# Altium PCB FPv1.3.1.PcbDoc (part 2 of 4)
Units mm, origin at the board's own origin, x right, y up, seen from the top; angles counter-clockwise.
Board outline 81.28 x 53.34 mm, 4 copper layers (Top Layer, GROUND PLANE, POWER PLANE, Bottom Layer); 98 components, 183 nets, 614 pads, 312 vias.
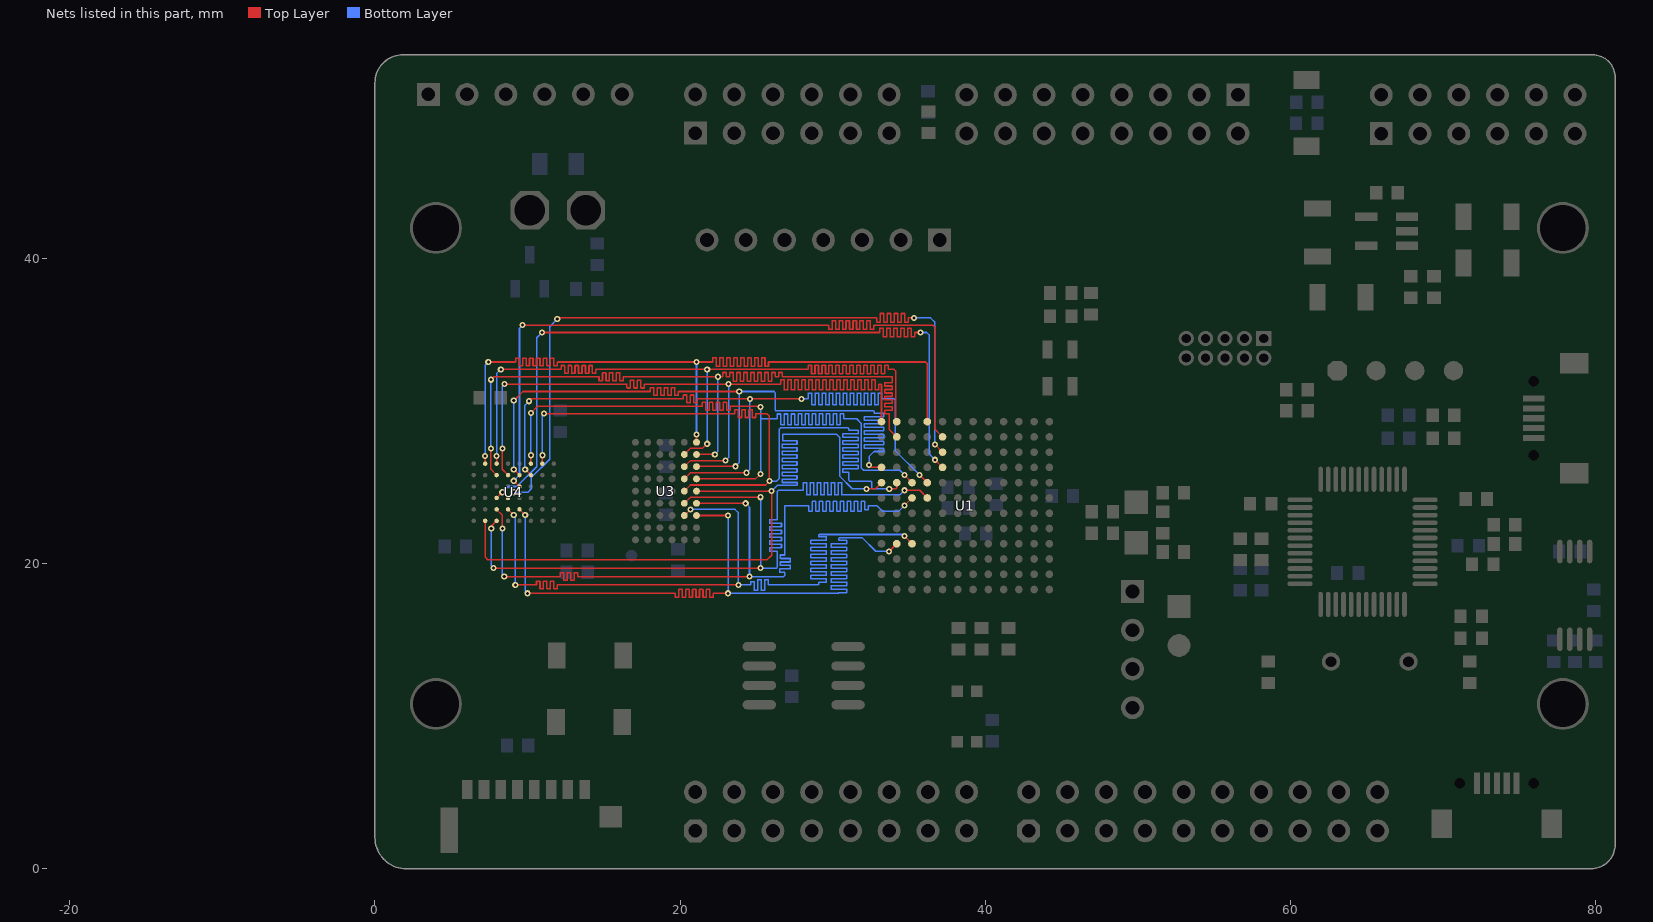
[diagram p4: the nets of this part, all layers, seen from the top]

## Via types
v1: diameter 0.403, hole 0.2, Top Layer to Bottom Layer, tented both sides, 261 vias
v2: diameter 0.503, hole 0.3, Top Layer to Bottom Layer, tented both sides, 25 vias
v3: diameter 0.6, hole 0.4, Top Layer to Bottom Layer, tented both sides, 11 vias
v4: diameter 0.508, hole 0.33, Top Layer to Bottom Layer, tented both sides, 5 vias
v5: diameter 0.703, hole 0.4, Top Layer to Bottom Layer, tented both sides, 3 vias
v6: diameter 0.603, hole 0.4, Top Layer to Bottom Layer, tented both sides, 2 vias
v7: diameter 0.503, hole 0.25, Top Layer to Bottom Layer, tented both sides, 2 vias
v8: diameter 0.6, hole 0.24, Top Layer to Bottom Layer, tented both sides, 1 vias
v9: diameter 0.508, hole 0.349, Top Layer to Bottom Layer, tented both sides, 1 vias
v10: diameter 0.603, hole 0.3, Top Layer to Bottom Layer, tented both sides, 1 vias

## Nets (pads, with @x,y where several pads share a name; then routed paths per layer and width w, separated by ;. In a path a pad name is that pad's centre, name@x,y a point inside that pad or via, vN(x,y) a via of type N, cw(c..) or ccw(c..) an arc to the next point about the centre after c; other vN are vias at no path point) (continued)
AD3: U1.B4 U3.G6 U4.D5 | length 61.7
  Top Layer w0.102: U4.D5@9.475,23.55 v1(9.85,23.175) ; v1(10,18.05) 19.65,18.05 cw(c19.65,18.029) 19.671,18.029 19.671,17.819 ccw(c19.694,17.819) 19.694,17.796 19.877,17.796 ccw(c19.877,17.819) 19.9,17.819 19.9,18.281 cw(c19.923,18.281) 19.923,18.304 20.105,18.304 cw(c20.105,18.281) 20.128,18.281 20.128,17.819 ccw(c20.151,17.819) 20.151,17.796 20.334,17.796 ccw(c20.334,17.819) 20.357,17.819 20.357,18.281 cw(c20.38,18.281) 20.38,18.304 20.563,18.304 cw(c20.563,18.281) 20.586,18.281 20.586,17.819 ccw(c20.608,17.819) 20.608,17.796 20.791,17.796 ccw(c20.791,17.819) 20.814,17.819 20.814,18.281 cw(c20.837,18.281) 20.837,18.304 21.02,18.304 cw(c21.02,18.281) 21.043,18.281 21.043,17.819 ccw(c21.066,17.819) 21.066,17.796 21.248,17.796 ccw(c21.248,17.819) 21.271,17.819 21.271,18.281 cw(c21.294,18.281) 21.294,18.304 21.477,18.304 cw(c21.477,18.281) 21.5,18.281 21.5,17.819 ccw(c21.523,17.819) 21.523,17.796 21.706,17.796 ccw(c21.706,17.819) 21.729,17.819 21.729,18.281 cw(c21.751,18.281) 21.751,18.304 21.934,18.304 cw(c21.934,18.281) 21.957,18.281 21.957,17.819 ccw(c21.98,17.819) 21.98,17.796 22.163,17.796 ccw(c22.163,17.819) 22.186,17.819 22.186,18.027 cw(c22.209,18.027) 22.209,18.05 v1(23.15,18.05) ; U3.G6@21.075,23.15 v1(23.15,23.15) ; v1(33.7,20.8) U1.B4@34.2,21.3
  Bottom Layer w0.102: v1(9.85,23.175) 9.85,18.2 v1(10,18.05) ; v1(23.15,23.15) v1(23.15,18.05) 30.369,18.05 30.404,18.085 30.404,18.098 30.9,18.098 ccw(c30.9,18.109) 30.912,18.109 30.912,18.315 ccw(c30.9,18.315) 30.9,18.326 29.907,18.326 cw(c29.907,18.338) 29.896,18.338 29.896,18.543 cw(c29.907,18.543) 29.907,18.555 30.9,18.555 ccw(c30.9,18.566) 30.912,18.566 30.912,18.772 ccw(c30.9,18.772) 30.9,18.783 29.907,18.783 cw(c29.907,18.795) 29.896,18.795 29.896,19 cw(c29.907,19) 29.907,19.012 30.9,19.012 ccw(c30.9,19.023) 30.912,19.023 30.912,19.229 ccw(c30.9,19.229) 30.9,19.241 29.907,19.241 cw(c29.907,19.252) 29.896,19.252 29.896,19.458 cw(c29.907,19.458) 29.907,19.469 30.9,19.469 ccw(c30.9,19.481) 30.912,19.481 30.912,19.686 ccw(c30.9,19.686) 30.9,19.698 29.907,19.698 cw(c29.907,19.709) 29.896,19.709 29.896,19.915 cw(c29.907,19.915) 29.907,19.926 30.9,19.926 ccw(c30.9,19.938) 30.912,19.938 30.912,20.143 ccw(c30.9,20.143) 30.9,20.155 29.907,20.155 cw(c29.907,20.166) 29.896,20.166 29.896,20.372 cw(c29.907,20.372) 29.907,20.383 30.9,20.383 ccw(c30.9,20.395) 30.912,20.395 30.912,20.601 ccw(c30.9,20.601) 30.9,20.612 29.907,20.612 cw(c29.907,20.624) 29.896,20.624 29.896,20.829 cw(c29.907,20.829) 29.907,20.841 30.9,20.841 ccw(c30.9,20.852) 30.912,20.852 30.912,21.058 ccw(c30.9,21.058) 30.9,21.069 29.907,21.069 cw(c29.907,21.081) 29.896,21.081 29.896,21.286 cw(c29.907,21.286) 29.907,21.298 30.9,21.298 ccw(c30.9,21.309) 30.912,21.309 30.912,21.515 ccw(c30.9,21.515) 30.9,21.526 30.404,21.526 30.404,21.641 30.463,21.7 31.919,21.7 32.819,20.8 v1(33.7,20.8)
AD4: U1.C4 U3.G5 U4.E5 | length 62.3
  Top Layer w0.102: U4.E5@8.725,23.55 v1(9.1,23.175) ; v1(9.2,18.6) 10.566,18.6 ccw(c10.566,18.623) 10.589,18.623 10.589,18.831 cw(c10.612,18.831) 10.612,18.854 10.795,18.854 cw(c10.795,18.831) 10.818,18.831 10.818,18.369 ccw(c10.841,18.369) 10.841,18.346 11.024,18.346 ccw(c11.024,18.369) 11.047,18.369 11.047,18.831 cw(c11.069,18.831) 11.069,18.854 11.252,18.854 cw(c11.252,18.831) 11.275,18.831 11.275,18.369 ccw(c11.298,18.369) 11.298,18.346 11.481,18.346 ccw(c11.481,18.369) 11.504,18.369 11.504,18.831 cw(c11.527,18.831) 11.527,18.854 11.709,18.854 cw(c11.709,18.831) 11.732,18.831 11.732,18.369 ccw(c11.755,18.369) 11.755,18.346 11.938,18.346 ccw(c11.938,18.369) 11.961,18.369 11.961,18.6 v1(23.825,18.6) ; U3.G5@20.275,23.15 v1(20.675,23.55) ; v1(34.7,21.8) U1.C4@35.2,21.3
  Bottom Layer w0.102: v1(9.1,23.175) 9.2,23.075 v1(9.2,18.6) ; v1(20.675,23.55) 23.6,23.55 23.825,23.325 v1(23.825,18.6) 24.625,18.6 24.625,18.795 cw(c24.637,18.795) 24.637,18.806 24.842,18.806 cw(c24.842,18.795) 24.854,18.795 24.854,18.265 ccw(c24.865,18.265) 24.865,18.253 25.071,18.253 ccw(c25.071,18.265) 25.082,18.265 25.082,18.935 cw(c25.094,18.935) 25.094,18.947 25.3,18.947 cw(c25.3,18.935) 25.311,18.935 25.311,18.265 ccw(c25.323,18.265) 25.323,18.253 25.528,18.253 ccw(c25.528,18.265) 25.54,18.265 25.54,18.935 cw(c25.551,18.935) 25.551,18.947 25.757,18.947 cw(c25.757,18.935) 25.768,18.935 25.768,18.6 29.039,18.6 29.083,18.644 29.083,18.783 29.58,18.783 ccw(c29.58,18.795) 29.591,18.795 29.591,19 ccw(c29.58,19) 29.58,19.012 28.586,19.012 cw(c28.586,19.023) 28.575,19.023 28.575,19.229 cw(c28.586,19.229) 28.586,19.241 29.58,19.241 ccw(c29.58,19.252) 29.591,19.252 29.591,19.458 ccw(c29.58,19.458) 29.58,19.469 28.586,19.469 cw(c28.586,19.481) 28.575,19.481 28.575,19.686 cw(c28.586,19.686) 28.586,19.698 29.58,19.698 ccw(c29.58,19.709) 29.591,19.709 29.591,19.915 ccw(c29.58,19.915) 29.58,19.926 28.586,19.926 cw(c28.586,19.938) 28.575,19.938 28.575,20.143 cw(c28.586,20.143) 28.586,20.155 29.58,20.155 ccw(c29.58,20.166) 29.591,20.166 29.591,20.372 ccw(c29.58,20.372) 29.58,20.383 28.586,20.383 cw(c28.586,20.395) 28.575,20.395 28.575,20.601 cw(c28.586,20.601) 28.586,20.612 29.58,20.612 ccw(c29.58,20.624) 29.591,20.624 29.591,20.829 ccw(c29.58,20.829) 29.58,20.841 28.586,20.841 cw(c28.586,20.852) 28.575,20.852 28.575,21.058 cw(c28.586,21.058) 28.586,21.069 29.58,21.069 ccw(c29.58,21.081) 29.591,21.081 29.591,21.286 ccw(c29.58,21.286) 29.58,21.298 28.586,21.298 cw(c28.586,21.309) 28.575,21.309 28.575,21.515 cw(c28.586,21.515) 28.586,21.526 29.58,21.526 ccw(c29.58,21.538) 29.591,21.538 29.591,21.744 ccw(c29.58,21.744) 29.58,21.755 29.083,21.755 29.083,21.869 29.117,21.903 34.597,21.903 v1(34.7,21.8)
AD5: U1.C7 U3.F6 U4.F5 | length 61.6
  Top Layer w0.102: U4.F5@7.975,23.55 8.35,23.175 v1(8.35,22.3) ; v1(8.475,19.15) 12.116,19.15 ccw(c12.116,19.173) 12.139,19.173 12.139,19.381 cw(c12.162,19.381) 12.162,19.404 12.345,19.404 cw(c12.345,19.381) 12.368,19.381 12.368,18.919 ccw(c12.391,18.919) 12.391,18.896 12.574,18.896 ccw(c12.574,18.919) 12.597,18.919 12.597,19.381 cw(c12.619,19.381) 12.619,19.404 12.802,19.404 cw(c12.802,19.381) 12.825,19.381 12.825,18.919 ccw(c12.848,18.919) 12.848,18.896 13.031,18.896 ccw(c13.031,18.919) 13.054,18.919 13.054,19.381 cw(c13.077,19.381) 13.077,19.404 13.259,19.404 cw(c13.259,19.381) 13.282,19.381 13.282,19.173 ccw(c13.305,19.173) 13.305,19.15 v1(24.55,19.15) ; U3.F6@21.075,23.95 v1(24.3,23.95) ; v1(34.7,23.8) U1.C7@35.2,24.3
  Bottom Layer w0.102: v1(8.35,22.3) 8.35,19.275 v1(8.475,19.15) ; v1(24.3,23.95) 24.55,23.7 v1(24.55,19.15) 26.795,19.15 26.848,19.202 26.848,19.418 26.538,19.418 cw(c26.538,19.43) 26.527,19.43 26.527,19.635 cw(c26.538,19.635) 26.538,19.647 27.217,19.647 ccw(c27.217,19.658) 27.229,19.658 27.229,19.864 ccw(c27.217,19.864) 27.217,19.875 26.59,19.875 cw(c26.59,19.887) 26.578,19.887 26.578,20.093 cw(c26.59,20.093) 26.59,20.104 27.217,20.104 ccw(c27.217,20.116) 27.229,20.116 27.229,20.321 ccw(c27.217,20.321) 27.217,20.333 26.59,20.333 cw(c26.59,20.344) 26.578,20.344 26.578,20.55 cw(c26.59,20.55) 26.59,20.561 26.848,20.561 26.848,23.749 26.899,23.8 28.435,23.8 28.435,23.419 28.664,23.419 28.664,24.097 28.892,24.097 28.892,23.419 29.121,23.419 29.121,24.097 29.35,24.097 29.35,23.419 29.578,23.419 29.578,24.097 29.807,24.097 29.807,23.419 30.035,23.419 30.035,24.097 30.264,24.097 30.264,23.419 30.493,23.419 30.493,24.097 30.721,24.097 30.721,23.419 30.95,23.419 30.95,24.097 31.178,24.097 31.178,23.419 31.407,23.419 31.407,24.097 31.636,24.097 31.636,23.419 31.864,23.419 31.864,24.097 32.093,24.097 32.093,23.519 32.322,23.519 32.322,23.8 32.893,23.8 33.274,23.419 34.319,23.419 v1(34.7,23.8)
AD6: U1.D7 U3.F5 U4.F6 | length 63.2
  Top Layer w0.102: v1(7.625,22.3) 7.625,22.45 U4.F6@7.975,22.8 ; v1(7.775,19.7) v1(25.275,19.7) ; U3.F5@20.275,23.95 20.675,24.35 v1(25.275,24.35) ; v1(34.7,24.8) 35.7,24.8 U1.D7@36.2,24.3
  Bottom Layer w0.102: v1(7.625,22.3) 7.625,19.85 v1(7.775,19.7) ; v1(25.275,24.35) v1(25.275,19.7) 26.3,19.7 26.375,19.775 26.375,20.815 25.878,20.815 cw(c25.878,20.827) 25.867,20.827 25.867,21.032 cw(c25.878,21.032) 25.878,21.044 26.633,21.044 ccw(c26.633,21.055) 26.645,21.055 26.645,21.261 ccw(c26.633,21.261) 26.633,21.273 25.878,21.273 cw(c25.878,21.284) 25.867,21.284 25.867,21.49 cw(c25.878,21.49) 25.878,21.501 26.633,21.501 ccw(c26.633,21.513) 26.645,21.513 26.645,21.718 ccw(c26.633,21.718) 26.633,21.73 25.878,21.73 cw(c25.878,21.741) 25.867,21.741 25.867,21.947 cw(c25.878,21.947) 25.878,21.958 26.633,21.958 ccw(c26.633,21.97) 26.645,21.97 26.645,22.175 ccw(c26.633,22.175) 26.633,22.187 25.878,22.187 cw(c25.878,22.198) 25.867,22.198 25.867,22.404 cw(c25.878,22.404) 25.878,22.415 26.633,22.415 ccw(c26.633,22.427) 26.645,22.427 26.645,22.633 ccw(c26.633,22.633) 26.633,22.644 25.878,22.644 cw(c25.878,22.656) 25.867,22.656 25.867,22.861 cw(c25.878,22.861) 25.878,22.873 26.375,22.873 26.375,24.724 26.441,24.79 28.08,24.79 28.08,25.287 cw(c28.091,25.287) 28.091,25.298 28.297,25.298 cw(c28.297,25.287) 28.308,25.287 28.308,24.515 ccw(c28.32,24.515) 28.32,24.503 28.525,24.503 ccw(c28.525,24.515) 28.537,24.515 28.537,25.287 cw(c28.548,25.287) 28.548,25.298 28.754,25.298 cw(c28.754,25.287) 28.765,25.287 28.765,24.515 ccw(c28.777,24.515) 28.777,24.503 28.983,24.503 ccw(c28.983,24.515) 28.994,24.515 28.994,25.287 cw(c29.006,25.287) 29.006,25.298 29.211,25.298 cw(c29.211,25.287) 29.223,25.287 29.223,24.515 ccw(c29.234,24.515) 29.234,24.503 29.44,24.503 ccw(c29.44,24.515) 29.451,24.515 29.451,25.287 cw(c29.463,25.287) 29.463,25.298 29.668,25.298 cw(c29.668,25.287) 29.68,25.287 29.68,24.515 ccw(c29.691,24.515) 29.691,24.503 29.897,24.503 ccw(c29.897,24.515) 29.909,24.515 29.909,25.287 cw(c29.92,25.287) 29.92,25.298 30.126,25.298 cw(c30.126,25.287) 30.137,25.287 30.137,24.515 ccw(c30.149,24.515) 30.149,24.503 30.354,24.503 ccw(c30.354,24.515) 30.366,24.515 30.366,25.287 cw(c30.377,25.287) 30.377,25.298 30.583,25.298 cw(c30.583,25.287) 30.594,25.287 30.594,24.515 ; 30.606,24.503 cw(c30.606,24.515) 30.594,24.515 ; v1(34.7,24.8) 34.415,24.515 30.594,24.515
AD7: U1.A8 U3.E6 U4.G6 | length 57.7
  Top Layer w0.102: U4.G6@7.225,22.8 7.225,20.425 7.4,20.25 25.7,20.25 26,20.55 v1(26,24.75) U3.E6@21.075,24.75 ; v1(32.207,24.892) 32.792,24.892 U1.A8@33.2,25.3
  Bottom Layer w0.102: v1(26,24.75) 26.371,25.121 27.661,25.121 27.686,25.146 27.686,25.298 27.673,25.311 26.703,25.311 cw(c26.703,25.323) 26.692,25.323 26.692,25.528 cw(c26.703,25.528) 26.703,25.54 27.649,25.54 ccw(c27.649,25.551) 27.661,25.551 27.661,25.757 ccw(c27.649,25.757) 27.649,25.768 26.707,25.768 cw(c26.707,25.78) 26.695,25.78 26.695,25.985 cw(c26.707,25.985) 26.707,25.997 27.649,25.997 ccw(c27.649,26.008) 27.661,26.008 27.661,26.214 ccw(c27.649,26.214) 27.649,26.226 26.707,26.226 cw(c26.707,26.237) 26.695,26.237 26.695,26.443 cw(c26.707,26.443) 26.707,26.454 27.649,26.454 ccw(c27.649,26.466) 27.661,26.466 27.661,26.671 ccw(c27.649,26.671) 27.649,26.683 26.707,26.683 cw(c26.707,26.694) 26.695,26.694 26.695,26.9 cw(c26.707,26.9) 26.707,26.911 27.649,26.911 ccw(c27.649,26.923) 27.661,26.923 27.661,27.128 ccw(c27.649,27.128) 27.649,27.14 26.707,27.14 cw(c26.707,27.151) 26.695,27.151 26.695,27.357 cw(c26.707,27.357) 26.707,27.368 27.649,27.368 ccw(c27.649,27.38) 27.661,27.38 27.661,27.586 ccw(c27.649,27.586) 27.649,27.597 26.707,27.597 cw(c26.707,27.609) 26.695,27.609 26.695,27.814 cw(c26.707,27.814) 26.707,27.826 27.649,27.826 ccw(c27.649,27.837) 27.661,27.837 27.661,28.043 ccw(c27.649,28.043) 27.649,28.054 26.733,28.054 26.721,28.067 26.721,28.448 26.746,28.473 30.251,28.473 30.455,28.27 30.455,25.73 31.286,24.899 32.2,24.899 v1(32.207,24.892)
AD8: U1.B8 U3.E5 U4.B1 | length 59.3
  Top Layer w0.102: U4.B1@10.975,26.55 v1(10.975,27.1) ; v1(11.075,29.825) 23.566,29.825 ccw(c23.566,29.848) 23.589,29.848 23.589,30.056 cw(c23.612,30.056) 23.612,30.079 23.795,30.079 cw(c23.795,30.056) 23.818,30.056 23.818,29.594 ccw(c23.841,29.594) 23.841,29.571 24.023,29.571 ccw(c24.023,29.594) 24.046,29.594 24.046,30.056 cw(c24.069,30.056) 24.069,30.079 24.252,30.079 cw(c24.252,30.056) 24.275,30.056 24.275,29.594 ccw(c24.298,29.594) 24.298,29.571 24.481,29.571 ccw(c24.481,29.594) 24.504,29.594 24.504,30.056 cw(c24.526,30.056) 24.526,30.079 24.709,30.079 cw(c24.709,30.056) 24.732,30.056 24.732,29.594 ccw(c24.755,29.594) 24.755,29.571 24.938,29.571 ccw(c24.938,29.594) 24.961,29.594 24.961,29.802 cw(c24.984,29.802) 24.984,29.825 25.7,29.825 25.85,29.675 v1(25.85,25.4) 25.6,25.15 20.675,25.15 U3.E5@20.275,24.75 ; v1(33.706,24.892) 34.138,24.892 34.2,24.954 U1.B8@34.2,25.3
  Bottom Layer w0.102: v1(10.975,27.1) 10.975,29.725 v1(11.075,29.825) ; v1(25.85,25.4) 26.325,25.4 26.492,25.567 26.492,28.804 26.577,28.888 31.03,28.888 31.064,28.854 31.064,28.74 31.674,28.74 31.674,28.511 30.657,28.511 30.657,28.283 31.674,28.283 31.674,28.054 30.658,28.054 30.658,27.826 31.674,27.826 31.674,27.597 30.658,27.597 30.658,27.368 31.674,27.368 31.674,27.14 30.658,27.14 30.658,26.911 31.674,26.911 31.674,26.683 30.658,26.683 30.658,26.454 31.674,26.454 31.674,26.226 30.658,26.226 30.658,25.997 31.064,25.997 31.064,25.451 31.115,25.4 32.487,25.4 32.561,25.325 32.561,24.944 32.614,24.892 32.794,24.892 ; 32.792,24.894 32.794,24.892 ; v1(33.706,24.892) 32.794,24.892
AD9: U1.C8 U3.D6 U4.C1 | length 57.7
  Top Layer w0.102: U4.C1@10.225,26.55 v1(10.225,27.1) ; v1(10.225,29.875) 10.658,30.308 21.434,30.308 ; U3.D6@21.075,25.55 24.95,25.55 v1(25.275,25.875) ; 21.457,30.331 cw(c21.434,30.331) 21.434,30.308 ; v1@25.271,30.308 23.309,30.308 ccw(c23.309,30.285) 23.286,30.285 23.286,30.077 cw(c23.263,30.077) 23.263,30.054 23.08,30.054 cw(c23.08,30.077) 23.057,30.077 23.057,30.539 ccw(c23.034,30.539) 23.034,30.562 22.851,30.562 ccw(c22.851,30.539) 22.829,30.539 22.829,30.077 cw(c22.806,30.077) 22.806,30.054 22.623,30.054 cw(c22.623,30.077) 22.6,30.077 22.6,30.539 ccw(c22.577,30.539) 22.577,30.562 22.394,30.562 ccw(c22.394,30.539) 22.371,30.539 22.371,30.077 cw(c22.348,30.077) 22.348,30.054 22.166,30.054 cw(c22.166,30.077) 22.143,30.077 22.143,30.539 ccw(c22.12,30.539) 22.12,30.562 21.937,30.562 ccw(c21.937,30.539) 21.914,30.539 21.914,30.077 cw(c21.891,30.077) 21.891,30.054 21.708,30.054 cw(c21.708,30.077) 21.686,30.077 21.686,30.539 ccw(c21.663,30.539) 21.663,30.562 21.48,30.562 ccw(c21.48,30.539) 21.457,30.539 21.457,30.308 21.434,30.308 ; v1(34.7,25.8) U1.C8@35.2,25.3
  Bottom Layer w0.102: v1(10.225,27.1) v1(10.225,29.875) v1@10.225,30 ; v1@25.271,25.875 25.271,30.246 v1(25.275,30.25) ; 25.273,29.489 26.378,29.489 26.378,29.791 cw(c26.389,29.791) 26.389,29.803 26.595,29.803 cw(c26.595,29.791) 26.607,29.791 26.607,29.12 ccw(c26.618,29.12) 26.618,29.108 26.824,29.108 ccw(c26.824,29.12) 26.835,29.12 26.835,29.791 cw(c26.847,29.791) 26.847,29.803 27.052,29.803 cw(c27.052,29.791) 27.064,29.791 27.064,29.12 ccw(c27.075,29.12) 27.075,29.108 27.281,29.108 ccw(c27.281,29.12) 27.292,29.12 27.292,29.791 cw(c27.304,29.791) 27.304,29.803 27.509,29.803 cw(c27.509,29.791) 27.521,29.791 27.521,29.12 ccw(c27.532,29.12) 27.532,29.108 27.738,29.108 ccw(c27.738,29.12) 27.749,29.12 27.749,29.796 cw(c27.761,29.796) 27.761,29.807 27.967,29.807 cw(c27.967,29.796) 27.978,29.796 27.978,29.12 ccw(c27.99,29.12) 27.99,29.108 28.195,29.108 ccw(c28.195,29.12) 28.207,29.12 28.207,29.796 cw(c28.218,29.796) 28.218,29.807 28.424,29.807 cw(c28.424,29.796) 28.435,29.796 28.435,29.12 ccw(c28.447,29.12) 28.447,29.108 28.652,29.108 ccw(c28.652,29.12) 28.664,29.12 28.664,29.796 cw(c28.675,29.796) 28.675,29.807 28.881,29.807 cw(c28.881,29.796) 28.892,29.796 28.892,29.12 ccw(c28.904,29.12) 28.904,29.108 29.11,29.108 ccw(c29.11,29.12) 29.121,29.12 29.121,29.796 cw(c29.133,29.796) 29.133,29.807 29.338,29.807 cw(c29.338,29.796) 29.35,29.796 29.35,29.12 ccw(c29.361,29.12) 29.361,29.108 29.567,29.108 ccw(c29.567,29.12) 29.578,29.12 29.578,29.796 cw(c29.59,29.796) 29.59,29.807 29.795,29.807 cw(c29.795,29.796) 29.807,29.796 29.807,29.12 ccw(c29.818,29.12) 29.818,29.108 30.024,29.108 ccw(c30.024,29.12) 30.035,29.12 30.035,29.796 cw(c30.047,29.796) 30.047,29.807 30.253,29.807 cw(c30.253,29.796) 30.264,29.796 30.264,29.12 ccw(c30.276,29.12) 30.276,29.108 30.481,29.108 ccw(c30.481,29.12) 30.493,29.12 30.493,29.796 cw(c30.504,29.796) 30.504,29.807 30.71,29.807 cw(c30.71,29.796) 30.721,29.796 30.721,29.489 31.572,29.489 31.877,29.185 31.877,26.264 32.029,26.111 34.389,26.111 v1(34.7,25.8)
AD10: U1.D8 U3.D5 U4.C2 | length 62.3
  Top Layer w0.102: v1(9.85,26.175) U4.C2@10.225,25.8 ; v1@10.1,30.792 20.198,30.792 ccw(c20.198,30.815) 20.221,30.815 20.221,31.023 cw(c20.244,31.023) 20.244,31.046 20.427,31.046 cw(c20.427,31.023) 20.45,31.023 20.45,30.561 ccw(c20.473,30.561) 20.473,30.538 20.656,30.538 ccw(c20.656,30.561) 20.679,30.561 20.679,31.023 cw(c20.701,31.023) 20.701,31.046 20.884,31.046 cw(c20.884,31.023) 20.907,31.023 20.907,30.561 ccw(c20.93,30.561) 20.93,30.538 21.113,30.538 ccw(c21.113,30.561) 21.136,30.561 21.136,30.769 cw(c21.159,30.769) 21.159,30.792 v1(24.575,30.792) v1(27.965,30.792) ; U3.D5@20.275,25.55 20.675,25.95 v1(24.35,25.95) ; v1(35.7,25.8) U1.D8@36.2,25.3
  Bottom Layer w0.102: v1(9.85,26.175) 9.833,26.192 9.833,30.375 v1(10.1,30.642) ; v1(24.35,25.95) 24.575,26.175 v1(24.575,30.792) ; v1(27.965,30.792) 28.41,30.792 28.41,31.161 cw(c28.421,31.161) 28.421,31.173 28.627,31.173 cw(c28.627,31.161) 28.639,31.161 28.639,30.422 ccw(c28.65,30.422) 28.65,30.411 28.856,30.411 ccw(c28.856,30.422) 28.867,30.422 28.867,31.161 cw(c28.879,31.161) 28.879,31.173 29.084,31.173 cw(c29.084,31.161) 29.096,31.161 29.096,30.422 ccw(c29.107,30.422) 29.107,30.411 29.313,30.411 ccw(c29.313,30.422) 29.324,30.422 29.324,31.161 cw(c29.336,31.161) 29.336,31.173 29.541,31.173 cw(c29.541,31.161) 29.553,31.161 29.553,30.422 ccw(c29.564,30.422) 29.564,30.411 29.77,30.411 ccw(c29.77,30.422) 29.781,30.422 29.781,31.161 cw(c29.793,31.161) 29.793,31.173 29.999,31.173 cw(c29.999,31.161) 30.01,31.161 30.01,30.422 ccw(c30.022,30.422) 30.022,30.411 30.227,30.411 ccw(c30.227,30.422) 30.239,30.422 30.239,31.161 cw(c30.25,31.161) 30.25,31.173 30.456,31.173 cw(c30.456,31.161) 30.467,31.161 30.467,30.422 ccw(c30.479,30.422) 30.479,30.411 30.684,30.411 ccw(c30.684,30.422) 30.696,30.422 30.696,31.161 cw(c30.707,31.161) 30.707,31.173 30.913,31.173 cw(c30.913,31.161) 30.924,31.161 30.924,30.422 ccw(c30.936,30.422) 30.936,30.411 31.142,30.411 ccw(c31.142,30.422) 31.153,30.422 31.153,31.161 cw(c31.165,31.161) 31.165,31.173 31.37,31.173 cw(c31.37,31.161) 31.382,31.161 31.382,30.422 ccw(c31.393,30.422) 31.393,30.411 31.599,30.411 ccw(c31.599,30.422) 31.61,30.422 31.61,31.161 cw(c31.622,31.161) 31.622,31.173 31.827,31.173 cw(c31.827,31.161) 31.839,31.161 31.839,30.422 ccw(c31.85,30.422) 31.85,30.411 32.056,30.411 ccw(c32.056,30.422) 32.067,30.422 32.067,31.161 cw(c32.079,31.161) 32.079,31.173 32.285,31.173 cw(c32.285,31.161) 32.296,31.161 32.296,30.422 ccw(c32.308,30.422) 32.308,30.411 32.513,30.411 ccw(c32.513,30.422) 32.525,30.422 32.525,31.161 cw(c32.536,31.161) 32.536,31.173 32.742,31.173 cw(c32.742,31.161) 32.753,31.161 32.753,30.422 ccw(c32.765,30.422) 32.765,30.411 32.97,30.411 ccw(c32.97,30.422) 32.982,30.422 32.982,31.161 cw(c32.993,31.161) 32.993,31.173 33.199,31.173 cw(c33.199,31.161) 33.21,31.161 33.21,30.792 34.029,30.792 34.087,30.734 34.087,27.413 v1(35.7,25.8)
AD11: U1.A9 U3.C6 U4.D2 | length 60.1
  Top Layer w0.102: v1(9.1,26.175) U4.D2@9.475,25.8 ; v1(9.1,30.675) 9.7,31.275 18.057,31.275 18.057,31.506 cw(c18.08,31.506) 18.08,31.529 18.263,31.529 cw(c18.263,31.506) 18.286,31.506 18.286,31.044 ccw(c18.308,31.044) 18.308,31.021 18.491,31.021 ccw(c18.491,31.044) 18.514,31.044 18.514,31.506 cw(c18.537,31.506) 18.537,31.529 18.72,31.529 cw(c18.72,31.506) 18.743,31.506 18.743,31.044 ccw(c18.766,31.044) 18.766,31.021 18.948,31.021 ccw(c18.948,31.044) 18.971,31.044 18.971,31.506 cw(c18.994,31.506) 18.994,31.529 19.177,31.529 cw(c19.177,31.506) 19.2,31.506 19.2,31.044 ccw(c19.223,31.044) 19.223,31.021 19.406,31.021 ccw(c19.406,31.044) 19.429,31.044 19.429,31.506 cw(c19.451,31.506) 19.451,31.529 19.634,31.529 cw(c19.634,31.506) 19.657,31.506 19.657,31.044 ccw(c19.68,31.044) 19.68,31.021 19.863,31.021 ccw(c19.863,31.044) 19.886,31.044 19.886,31.252 cw(c19.909,31.252) 19.909,31.275 v1(23.875,31.275) ; U3.C6@21.075,26.35 21.1,26.375 v1(23.625,26.375) ; v1(32.385,26.467) 32.552,26.3 U1.A9@33.2,26.3
  Bottom Layer w0.102: v1(9.1,26.175) v1(9.1,30.675) ; v1(23.625,26.375) 23.875,26.625 v1(23.875,31.275) 26.154,31.275 26.225,31.204 26.225,30.061 26.276,30.011 32.677,30.011 32.715,29.972 32.715,29.858 33.35,29.858 33.35,29.629 32.08,29.629 32.08,29.4 33.35,29.4 33.35,29.172 32.08,29.172 32.08,28.943 33.35,28.943 33.35,28.715 32.08,28.715 32.08,28.486 33.35,28.486 33.35,28.258 32.08,28.258 32.08,28.029 33.346,28.029 33.346,27.8 32.08,27.8 32.08,27.572 33.35,27.572 33.35,27.343 32.715,27.343 32.385,27.013 v1(32.385,26.467)
AD12: U1.A12 U3.C5 U4.E2 | length 61.9
  Top Layer w0.102: v1@8.35,27.475 8.35,26.175 U4.E2@8.725,25.8 ; v1(8.5,31.758) 16.495,31.758 cw(c16.495,31.735) 16.518,31.735 16.518,31.527 ccw(c16.541,31.527) 16.541,31.504 16.723,31.504 ccw(c16.723,31.527) 16.746,31.527 16.746,31.989 cw(c16.769,31.989) 16.769,32.012 16.952,32.012 cw(c16.952,31.989) 16.975,31.989 16.975,31.527 ccw(c16.998,31.527) 16.998,31.504 17.181,31.504 ccw(c17.181,31.527) 17.204,31.527 17.204,31.989 cw(c17.226,31.989) 17.226,32.012 17.409,32.012 cw(c17.409,31.989) 17.432,31.989 17.432,31.527 ccw(c17.455,31.527) 17.455,31.504 17.638,31.504 ccw(c17.638,31.527) 17.661,31.527 17.661,31.735 cw(c17.684,31.735) 17.684,31.758 v1(23.175,31.758) 26.607,31.758 26.607,32.027 cw(c26.618,32.027) 26.618,32.039 26.824,32.039 cw(c26.824,32.027) 26.835,32.027 26.835,31.389 ccw(c26.847,31.389) 26.847,31.377 27.052,31.377 ccw(c27.052,31.389) 27.064,31.389 27.064,32.027 cw(c27.075,32.027) 27.075,32.039 27.281,32.039 cw(c27.281,32.027) 27.292,32.027 27.292,31.389 ccw(c27.304,31.389) 27.304,31.377 27.509,31.377 ccw(c27.509,31.389) 27.521,31.389 27.521,32.027 cw(c27.532,32.027) 27.532,32.039 27.738,32.039 cw(c27.738,32.027) 27.749,32.027 27.749,31.389 ccw(c27.761,31.389) 27.761,31.377 27.967,31.377 ccw(c27.967,31.389) 27.978,31.389 27.978,32.027 cw(c27.99,32.027) 27.99,32.039 28.195,32.039 cw(c28.195,32.027) 28.207,32.027 28.207,31.389 ccw(c28.218,31.389) 28.218,31.377 28.424,31.377 ccw(c28.424,31.389) 28.435,31.389 28.435,32.027 cw(c28.447,32.027) 28.447,32.039 28.652,32.039 cw(c28.652,32.027) 28.664,32.027 28.664,31.389 ccw(c28.675,31.389) 28.675,31.377 28.881,31.377 ccw(c28.881,31.389) 28.892,31.389 28.892,32.027 cw(c28.904,32.027) 28.904,32.039 29.11,32.039 cw(c29.11,32.027) 29.121,32.027 29.121,31.389 ccw(c29.133,31.389) 29.133,31.377 29.338,31.377 ccw(c29.338,31.389) 29.35,31.389 29.35,32.027 cw(c29.361,32.027) 29.361,32.039 29.567,32.039 cw(c29.567,32.027) 29.578,32.027 29.578,31.389 ccw(c29.59,31.389) 29.59,31.377 29.795,31.377 ccw(c29.795,31.389) 29.807,31.389 29.807,32.027 cw(c29.818,32.027) 29.818,32.039 30.024,32.039 cw(c30.024,32.027) 30.035,32.027 30.035,31.389 ccw(c30.047,31.389) 30.047,31.377 30.253,31.377 ccw(c30.253,31.389) 30.264,31.389 30.264,32.027 cw(c30.276,32.027) 30.276,32.039 30.481,32.039 cw(c30.481,32.027) 30.493,32.027 30.493,31.389 ccw(c30.504,31.389) 30.504,31.377 30.71,31.377 ccw(c30.71,31.389) 30.721,31.389 30.721,32.027 cw(c30.733,32.027) 30.733,32.039 30.938,32.039 cw(c30.938,32.027) 30.95,32.027 30.95,31.389 ccw(c30.961,31.389) 30.961,31.377 31.167,31.377 ccw(c31.167,31.389) 31.178,31.389 31.178,32.027 cw(c31.19,32.027) 31.19,32.039 31.396,32.039 cw(c31.396,32.027) 31.407,32.027 31.407,31.389 ccw(c31.419,31.389) 31.419,31.377 31.624,31.377 ccw(c31.624,31.389) 31.636,31.389 31.636,32.027 cw(c31.647,32.027) 31.647,32.039 31.853,32.039 cw(c31.853,32.027) 31.864,32.027 31.864,31.389 ccw(c31.876,31.389) 31.876,31.377 32.081,31.377 ccw(c32.081,31.389) 32.093,31.389 32.093,32.027 cw(c32.104,32.027) 32.104,32.039 32.31,32.039 cw(c32.31,32.027) 32.322,32.027 32.322,31.389 ccw(c32.333,31.389) 32.333,31.377 32.539,31.377 ccw(c32.539,31.389) 32.55,31.389 32.55,32.027 cw(c32.562,32.027) 32.562,32.039 32.767,32.039 cw(c32.767,32.027) 32.779,32.027 32.779,31.389 ccw(c32.79,31.389) 32.79,31.377 32.996,31.377 ccw(c32.996,31.389) 33.007,31.389 33.007,31.758 33.164,31.758 33.2,31.722 U1.A12@33.2,29.3 ; U3.C5@20.275,26.35 20.675,26.75 v1(22.975,26.75)
  Bottom Layer w0.102: v1(8.35,27.55) 8.35,31.608 v1(8.5,31.758) ; v1(22.975,26.75) 23.175,26.95 v1(23.175,31.758)
AD13: U1.B11 U3.B6 U4.F2 | length 59.9
  Top Layer w0.102: v1(7.6,27.55) 7.6,26.175 U4.F2@7.975,25.8 ; v1(7.6,32.05) 7.792,32.242 14.663,32.242 cw(c14.663,32.219) 14.686,32.219 14.686,32.011 ccw(c14.708,32.011) 14.708,31.988 14.891,31.988 ccw(c14.891,32.011) 14.914,32.011 14.914,32.473 cw(c14.937,32.473) 14.937,32.496 15.12,32.496 cw(c15.12,32.473) 15.143,32.473 15.143,32.011 ccw(c15.166,32.011) 15.166,31.988 15.348,31.988 ccw(c15.348,32.011) 15.371,32.011 15.371,32.473 cw(c15.394,32.473) 15.394,32.496 15.577,32.496 cw(c15.577,32.473) 15.6,32.473 15.6,32.011 ccw(c15.623,32.011) 15.623,31.988 15.806,31.988 ccw(c15.806,32.011) 15.829,32.011 15.829,32.473 cw(c15.851,32.473) 15.851,32.496 16.034,32.496 cw(c16.034,32.473) 16.057,32.473 16.057,32.011 ccw(c16.08,32.011) 16.08,31.988 16.263,31.988 ccw(c16.263,32.011) 16.286,32.011 16.286,32.219 cw(c16.309,32.219) 16.309,32.242 v1(22.475,32.242) 22.796,32.242 22.796,32.51 cw(c22.808,32.51) 22.808,32.522 23.014,32.522 cw(c23.014,32.51) 23.025,32.51 23.025,32.242 23.254,32.242 23.254,32.51 cw(c23.265,32.51) 23.265,32.522 23.471,32.522 cw(c23.471,32.51) 23.482,32.51 23.482,31.973 ccw(c23.494,31.973) 23.494,31.961 23.699,31.961 ccw(c23.699,31.973) 23.711,31.973 23.711,32.51 cw(c23.722,32.51) 23.722,32.522 23.928,32.522 cw(c23.928,32.51) 23.939,32.51 23.939,31.973 ccw(c23.951,31.973) 23.951,31.961 24.157,31.961 ccw(c24.157,31.973) 24.168,31.973 24.168,32.51 cw(c24.18,32.51) 24.18,32.522 24.385,32.522 cw(c24.385,32.51) 24.397,32.51 24.397,31.973 ccw(c24.408,31.973) 24.408,31.961 24.614,31.961 ccw(c24.614,31.973) 24.625,31.973 24.625,32.51 cw(c24.637,32.51) 24.637,32.522 24.842,32.522 cw(c24.842,32.51) 24.854,32.51 24.854,31.973 ccw(c24.865,31.973) 24.865,31.961 25.071,31.961 ccw(c25.071,31.973) 25.082,31.973 25.082,32.51 cw(c25.094,32.51) 25.094,32.522 25.3,32.522 cw(c25.3,32.51) 25.311,32.51 25.311,31.973 ccw(c25.323,31.973) 25.323,31.961 25.528,31.961 ccw(c25.528,31.973) 25.54,31.973 25.54,32.51 cw(c25.551,32.51) 25.551,32.522 25.757,32.522 cw(c25.757,32.51) 25.768,32.51 25.768,31.973 ccw(c25.78,31.973) 25.78,31.961 25.985,31.961 ccw(c25.985,31.973) 25.997,31.973 25.997,32.51 cw(c26.008,32.51) 26.008,32.522 26.214,32.522 cw(c26.214,32.51) 26.226,32.51 26.226,32.242 26.454,32.242 26.454,32.51 cw(c26.466,32.51) 26.466,32.522 26.671,32.522 cw(c26.671,32.51) 26.683,32.51 26.683,32.242 33.9,32.242 33.918,32.224 33.918,31.876 ; U3.B6@21.075,27.15 v1(22.275,27.15) ; U1.B11@34.2,28.3 33.706,28.794 33.706,29.807 33.415,29.807 cw(c33.415,29.818) 33.403,29.818 33.403,30.024 cw(c33.415,30.024) 33.415,30.035 33.907,30.035 ccw(c33.907,30.047) 33.918,30.047 33.918,30.253 ccw(c33.907,30.253) 33.907,30.264 33.415,30.264 cw(c33.415,30.276) 33.403,30.276 33.403,30.481 cw(c33.415,30.481) 33.415,30.493 33.907,30.493 ccw(c33.907,30.504) 33.918,30.504 33.918,30.71 ccw(c33.907,30.71) 33.907,30.721 33.415,30.721 cw(c33.415,30.733) 33.403,30.733 33.403,30.938 cw(c33.415,30.938) 33.415,30.95 33.907,30.95 ccw(c33.907,30.961) 33.918,30.961 33.918,31.167 ccw(c33.907,31.167) 33.907,31.178 33.415,31.178 cw(c33.415,31.19) 33.403,31.19 33.403,31.396 cw(c33.415,31.396) 33.415,31.407 33.907,31.407 ccw(c33.907,31.419) 33.918,31.419 33.918,31.624 ccw(c33.907,31.624) 33.907,31.636 33.415,31.636 cw(c33.415,31.647) 33.403,31.647 33.403,31.853 cw(c33.415,31.853) 33.415,31.864 33.907,31.864 ; 33.907,31.864 ccw(c33.907,31.876) 33.918,31.876 ; 33.907,31.864 33.918,31.876
  Bottom Layer w0.102: v1@7.6,27.525 v1(7.6,32.05) ; v1(22.275,27.15) 22.475,27.35 v1(22.475,32.242)
AD14: U1.B12 U3.B5 U4.F1 | length 60
  Top Layer w0.102: U4.F1@7.975,26.55 v1@7.975,27.1 ; v1(8.25,32.725) 12.175,32.725 12.2,32.75 12.2,32.956 cw(c12.223,32.956) 12.223,32.979 12.405,32.979 cw(c12.405,32.956) 12.428,32.956 12.428,32.494 ccw(c12.451,32.494) 12.451,32.471 12.634,32.471 ccw(c12.634,32.494) 12.657,32.494 12.657,32.956 cw(c12.68,32.956) 12.68,32.979 12.863,32.979 cw(c12.863,32.956) 12.886,32.956 12.886,32.494 ccw(c12.908,32.494) 12.908,32.471 13.091,32.471 ccw(c13.091,32.494) 13.114,32.494 13.114,32.956 cw(c13.137,32.956) 13.137,32.979 13.32,32.979 cw(c13.32,32.956) 13.343,32.956 13.343,32.494 ccw(c13.366,32.494) 13.366,32.471 13.548,32.471 ccw(c13.548,32.494) 13.571,32.494 13.571,32.956 cw(c13.594,32.956) 13.594,32.979 13.777,32.979 cw(c13.777,32.956) 13.8,32.956 13.8,32.494 ccw(c13.823,32.494) 13.823,32.471 14.006,32.471 ccw(c14.006,32.494) 14.029,32.494 14.029,32.956 cw(c14.051,32.956) 14.051,32.979 14.234,32.979 cw(c14.234,32.956) 14.257,32.956 14.257,32.494 ccw(c14.28,32.494) 14.28,32.471 14.463,32.471 ccw(c14.463,32.494) 14.486,32.494 14.486,32.702 cw(c14.509,32.702) 14.509,32.725 v1(21.775,32.725) 28.384,32.725 28.384,33.005 28.613,33.005 28.613,32.445 28.842,32.445 28.842,33.005 29.07,33.005 29.07,32.445 29.299,32.445 29.299,33.005 29.527,33.005 29.527,32.445 29.756,32.445 29.756,33.005 29.985,33.005 29.985,32.445 30.213,32.445 30.213,33.005 30.442,33.005 30.442,32.445 30.67,32.445 30.67,33.005 30.899,33.005 30.899,32.445 31.128,32.445 31.128,33.005 31.356,33.005 31.356,32.445 31.585,32.445 31.585,33.005 31.813,33.005 31.813,32.445 32.042,32.445 32.042,33.005 32.271,33.005 32.271,32.445 32.499,32.445 32.499,33.005 32.728,33.005 32.728,32.445 32.956,32.445 32.956,33.005 33.185,33.005 33.185,32.445 33.414,32.445 33.414,33.005 33.642,33.005 33.642,32.725 34.026,32.725 34.121,32.63 34.121,29.379 U1.B12@34.2,29.3 ; U3.B5@20.275,27.15 20.675,27.55 21.475,27.55 v1(21.775,27.85)
  Bottom Layer w0.102: v1(7.975,27.05) 7.975,32.45 v1(8.25,32.725) ; v1(21.775,27.85) v1(21.775,32.725)
AD15: U1.D12 U3.A6 U4.G1 | length 59.3
  Top Layer w0.102: U4.G1@7.225,26.55 v1(7.225,27.05) ; v1(7.429,33.208) 9.195,33.208 ccw(c9.195,33.231) 9.217,33.231 9.217,33.439 cw(c9.24,33.439) 9.24,33.462 9.423,33.462 cw(c9.423,33.439) 9.446,33.439 9.446,32.977 ccw(c9.469,32.977) 9.469,32.954 9.652,32.954 ccw(c9.652,32.977) 9.675,32.977 9.675,33.439 cw(c9.698,33.439) 9.698,33.462 9.88,33.462 cw(c9.88,33.439) 9.903,33.439 9.903,32.977 ccw(c9.926,32.977) 9.926,32.954 10.109,32.954 ccw(c10.109,32.977) 10.132,32.977 10.132,33.439 cw(c10.155,33.439) 10.155,33.462 10.338,33.462 cw(c10.338,33.439) 10.36,33.439 10.36,32.977 ccw(c10.383,32.977) 10.383,32.954 10.566,32.954 ccw(c10.566,32.977) 10.589,32.977 10.589,33.439 cw(c10.612,33.439) 10.612,33.462 10.795,33.462 cw(c10.795,33.439) 10.818,33.439 10.818,32.977 ccw(c10.841,32.977) 10.841,32.954 11.023,32.954 ccw(c11.023,32.977) 11.046,32.977 11.046,33.439 cw(c11.069,33.439) 11.069,33.462 11.252,33.462 cw(c11.252,33.439) 11.275,33.439 11.275,32.977 ccw(c11.298,32.977) 11.298,32.954 11.481,32.954 ccw(c11.481,32.977) 11.503,32.977 11.503,33.439 cw(c11.526,33.439) 11.526,33.462 11.709,33.462 cw(c11.709,33.439) 11.732,33.439 11.732,32.977 ccw(c11.755,32.977) 11.755,32.954 11.938,32.954 ccw(c11.938,32.977) 11.961,32.977 11.961,33.185 cw(c11.984,33.185) 11.984,33.208 v1(21.071,33.208) 22.136,33.208 22.136,33.477 cw(c22.148,33.477) 22.148,33.488 22.353,33.488 cw(c22.353,33.477) 22.365,33.477 22.365,32.94 ccw(c22.376,32.94) 22.376,32.928 22.582,32.928 ccw(c22.582,32.94) 22.593,32.94 22.593,33.477 cw(c22.605,33.477) 22.605,33.488 22.81,33.488 cw(c22.81,33.477) 22.822,33.477 22.822,32.94 ccw(c22.833,32.94) 22.833,32.928 23.039,32.928 ccw(c23.039,32.94) 23.05,32.94 23.05,33.477 cw(c23.062,33.477) 23.062,33.488 23.268,33.488 cw(c23.268,33.477) 23.279,33.477 23.279,32.94 ccw(c23.291,32.94) 23.291,32.928 23.496,32.928 ccw(c23.496,32.94) 23.508,32.94 23.508,33.477 cw(c23.519,33.477) 23.519,33.488 23.725,33.488 cw(c23.725,33.477) 23.736,33.477 23.736,32.94 ccw(c23.748,32.94) 23.748,32.928 23.953,32.928 ccw(c23.953,32.94) 23.965,32.94 23.965,33.477 cw(c23.976,33.477) 23.976,33.488 24.182,33.488 cw(c24.182,33.477) 24.194,33.477 24.194,32.94 ccw(c24.205,32.94) 24.205,32.928 24.411,32.928 ccw(c24.411,32.94) 24.422,32.94 24.422,33.477 cw(c24.434,33.477) 24.434,33.488 24.639,33.488 cw(c24.639,33.477) 24.651,33.477 24.651,32.94 ccw(c24.662,32.94) 24.662,32.928 24.868,32.928 ccw(c24.868,32.94) 24.879,32.94 24.879,33.477 cw(c24.891,33.477) 24.891,33.488 25.096,33.488 cw(c25.096,33.477) 25.108,33.477 25.108,32.94 ccw(c25.119,32.94) 25.119,32.928 25.325,32.928 ccw(c25.325,32.94) 25.336,32.94 25.336,33.477 cw(c25.348,33.477) 25.348,33.488 25.554,33.488 cw(c25.554,33.477) 25.565,33.477 25.565,32.94 ccw(c25.577,32.94) 25.577,32.928 25.782,32.928 ccw(c25.782,32.94) 25.794,32.94 25.794,33.208 36.108,33.208 36.2,33.117 U1.D12@36.2,29.3 ; U3.A6@21.075,27.95 v1(21.075,28.45)
  Bottom Layer w0.102: v1(7.225,27.05) 7.225,33.004 v1(7.429,33.208) ; v1(21.071,33.208) 21.075,33.204 v1(21.075,28.45)
AD16: U1.E9 U4.F4 | length 52.4
  Top Layer w0.102: U4.F4@7.975,24.3 v1(8.35,24.675) ; v1(10.95,35.142) 33.084,35.142 33.084,35.41 cw(c33.095,35.41) 33.095,35.422 33.301,35.422 cw(c33.301,35.41) 33.312,35.41 33.312,34.873 ccw(c33.324,34.873) 33.324,34.861 33.529,34.861 ccw(c33.529,34.873) 33.541,34.873 33.541,35.41 cw(c33.552,35.41) 33.552,35.422 33.758,35.422 cw(c33.758,35.41) 33.769,35.41 33.769,34.873 ccw(c33.781,34.873) 33.781,34.861 33.986,34.861 ccw(c33.986,34.873) 33.998,34.873 33.998,35.41 cw(c34.009,35.41) 34.009,35.422 34.215,35.422 cw(c34.215,35.41) 34.227,35.41 34.227,34.873 ccw(c34.238,34.873) 34.238,34.861 34.444,34.861 ccw(c34.444,34.873) 34.455,34.873 34.455,35.41 cw(c34.467,35.41) 34.467,35.422 34.672,35.422 cw(c34.672,35.41) 34.684,35.41 34.684,34.873 ccw(c34.695,34.873) 34.695,34.861 34.901,34.861 ccw(c34.901,34.873) 34.912,34.873 34.912,35.41 cw(c34.924,35.41) 34.924,35.422 35.129,35.422 cw(c35.129,35.41) 35.141,35.41 35.141,34.873 ccw(c35.152,34.873) 35.152,34.861 35.358,34.861 ccw(c35.358,34.873) 35.369,34.873 35.369,35.142 v1(35.75,35.142) ; v1(36.7,26.8) U1.E9@37.2,26.3
  Bottom Layer w0.102: v1(8.35,24.675) 8.725,25.05 9.3,25.05 10.6,26.35 10.6,34.792 v1(10.95,35.142) ; v1(35.75,35.142) 36.156,35.142 36.322,34.976 36.322,27.178 v1(36.7,26.8)
AD17: U1.E10 U4.E4 | length 52.2
  Top Layer w0.102: U4.E4@8.725,24.3 v1(9.1,24.675) ; v1(11.95,36.025) 12.033,36.108 32.88,36.108 32.88,35.84 ccw(c32.892,35.84) 32.892,35.828 33.097,35.828 ccw(c33.097,35.84) 33.109,35.84 33.109,36.377 cw(c33.12,36.377) 33.12,36.388 33.326,36.388 cw(c33.326,36.377) 33.337,36.377 33.337,35.84 ccw(c33.349,35.84) 33.349,35.828 33.555,35.828 ccw(c33.555,35.84) 33.566,35.84 33.566,36.377 cw(c33.578,36.377) 33.578,36.388 33.783,36.388 cw(c33.783,36.377) 33.795,36.377 33.795,35.84 ccw(c33.806,35.84) 33.806,35.828 34.012,35.828 ccw(c34.012,35.84) 34.023,35.84 34.023,36.377 cw(c34.035,36.377) 34.035,36.388 34.24,36.388 cw(c34.24,36.377) 34.252,36.377 34.252,35.84 ccw(c34.263,35.84) 34.263,35.828 34.469,35.828 ccw(c34.469,35.84) 34.48,35.84 34.48,36.377 cw(c34.492,36.377) 34.492,36.388 34.698,36.388 cw(c34.698,36.377) 34.709,36.377 34.709,35.84 ccw(c34.721,35.84) 34.721,35.828 34.926,35.828 ccw(c34.926,35.84) 34.938,35.84 34.938,36.108 35.317,36.108 v1(35.325,36.1) ; v1(36.7,27.8) U1.E10@37.2,27.3
  Bottom Layer w0.102: v1(9.1,24.675) 10.025,24.675 10.25,24.9 10.25,25.274 10.246,25.278 10.246,25.634 11.45,26.838 11.45,35.525 v1(11.95,36.025) ; v1(35.325,36.1) 36.417,36.1 36.7,35.817 v1(36.7,27.8)
AD18: U1.E11 U4.D3 | length 52.6
  Top Layer w0.102: v1(9.1,25.425) U4.D3@9.475,25.05 ; v1(9.675,35.625) 29.731,35.625 29.731,35.356 ccw(c29.742,35.356) 29.742,35.345 29.948,35.345 ccw(c29.948,35.356) 29.959,35.356 29.959,35.894 cw(c29.971,35.894) 29.971,35.905 30.176,35.905 cw(c30.176,35.894) 30.188,35.894 30.188,35.356 ccw(c30.199,35.356) 30.199,35.345 30.405,35.345 ccw(c30.405,35.356) 30.416,35.356 30.416,35.894 cw(c30.428,35.894) 30.428,35.905 30.634,35.905 cw(c30.634,35.894) 30.645,35.894 30.645,35.356 ccw(c30.657,35.356) 30.657,35.345 30.862,35.345 ccw(c30.862,35.356) 30.874,35.356 30.874,35.894 cw(c30.885,35.894) 30.885,35.905 31.091,35.905 cw(c31.091,35.894) 31.102,35.894 31.102,35.356 ccw(c31.114,35.356) 31.114,35.345 31.319,35.345 ccw(c31.319,35.356) 31.331,35.356 31.331,35.894 cw(c31.342,35.894) 31.342,35.905 31.548,35.905 cw(c31.548,35.894) 31.559,35.894 31.559,35.356 ccw(c31.571,35.356) 31.571,35.345 31.777,35.345 ccw(c31.777,35.356) 31.788,35.356 31.788,35.894 cw(c31.8,35.894) 31.8,35.905 32.005,35.905 cw(c32.005,35.894) 32.017,35.894 32.017,35.356 ccw(c32.028,35.356) 32.028,35.345 32.234,35.345 ccw(c32.234,35.356) 32.245,35.356 32.245,35.894 cw(c32.257,35.894) 32.257,35.905 32.462,35.905 cw(c32.462,35.894) 32.474,35.894 32.474,35.356 ccw(c32.485,35.356) 32.485,35.345 32.691,35.345 ccw(c32.691,35.356) 32.703,35.356 32.703,35.625 36.562,35.625 36.7,35.487 36.7,28.8 U1.E11@37.2,28.3
  Bottom Layer w0.102: v1(9.1,25.425) 9.475,25.8 9.475,35.425 v1(9.675,35.625)